# Altium PCB LED Board.PcbDoc
Units mil, origin at the board's own origin, x right, y up, seen from the top; angles counter-clockwise.
Board outline 800 x 800 mil, 2 copper layers (Top Layer, Bottom Layer); 1 components, 3 nets, 7 pads, 33 vias.
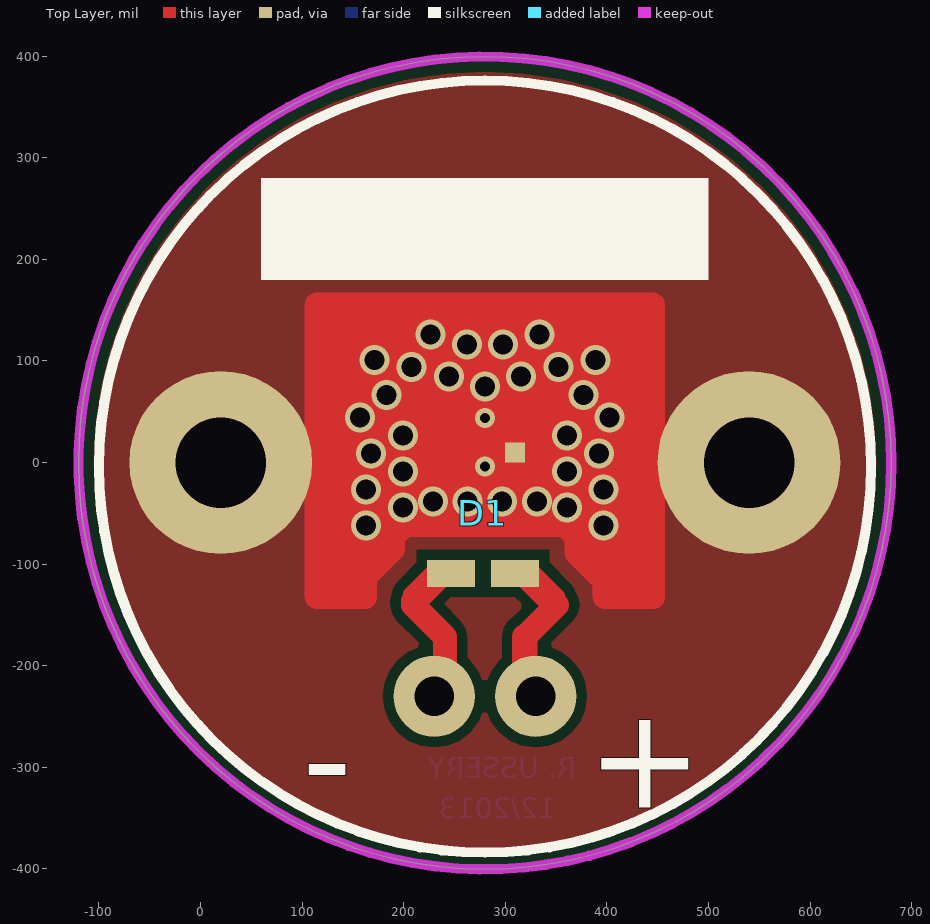
[diagram p0: Top Layer view]
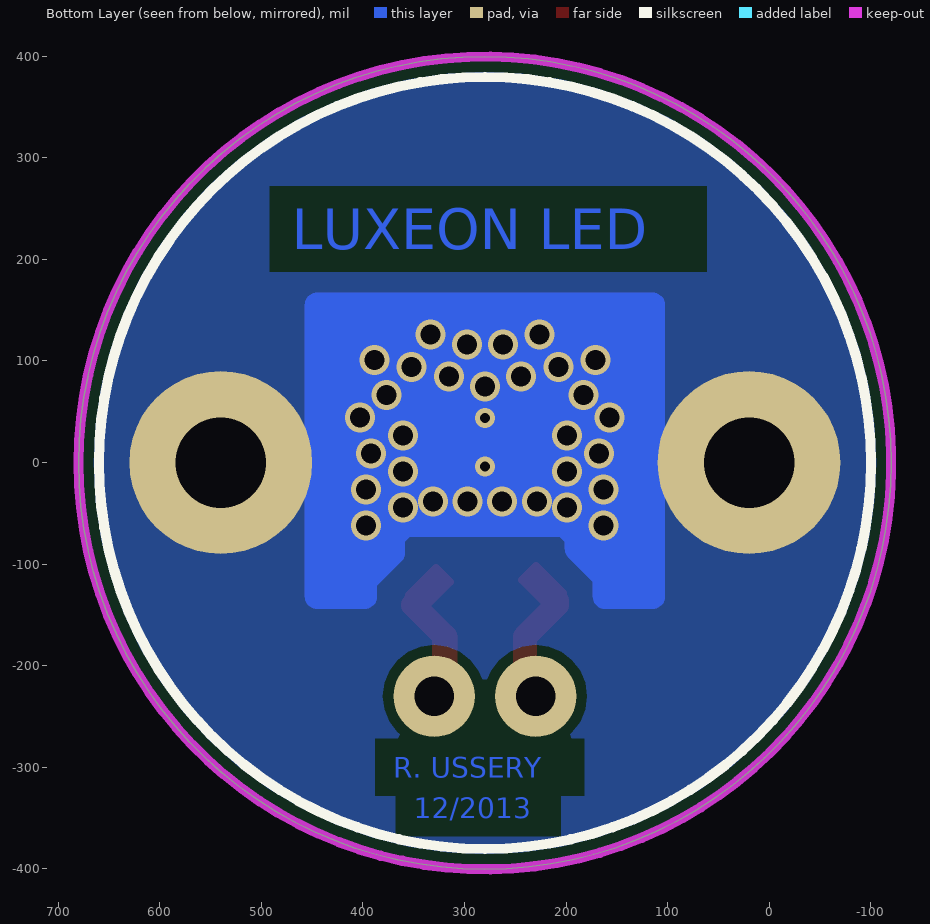
[diagram p1: Bottom Layer view, seen from below]

## Layer stack, top to bottom
Top Layer: signal copper 1.4
Dielectric: dielectric 12.6, FR-4, Dk 4.8
Bottom Layer: signal copper 1.4

## Board outline
-120,-0.35 ccw(c280,-0.35) 280,-400.35 ccw(c280,-0.35) 680,-0.35 ccw(c280,-0.35) 280,399.65 ccw(c280,-0.35)

## Design rules (kind name [scope] priority, off if disabled: settings)
Clearance [All] p1: gap=10
MinimumSolderMaskSliver [All] p1: minsoldermaskwidth=5
PolygonConnect [All] p1: connectstyle=Direct reliefconductorwidth=10 reliefentries=4 polygonreliefangle="90 Angle" airgapwidth=10
RoutingVias [All] p1: holewidth=28 width=50 viastyle="Through Hole" minholewidth=28 minwidth=50 maxholewidth=28 maxwidth=50
SolderMaskExpansion [All] p1: expansion=4
Width [All] p1: maxlimit=100 minlimit=6 preferedwidth=10
27 further rules are at their usual default settings.

## Components (designator, comment, footprint, x,y, rotation, side; value= is the part's Value field where it differs from the comment)
D1 "DIODE_WITH_HEATSINK" LUXEON_LED 280,0 r0 top

## Footprints (in the part's own frame and the unit in brackets; to place one, negate y for a bottom-side part, rotate by r counter-clockwise, add the part's x,y. Pads: shape width x height; smd on the part's side, far side on the other; paste and mask are expansions set on the pad)
LUXEON_LED [mm]
  rect 1.2x0.67 smd paste-0.1 mask+0: 1(-0.85,-2.775) 2(0.75,-2.775)
  rect 0.5x0.5 smd paste+0 mask+0: 3(0.75,0.25)
  Top Layer region: -1.275,-2.58 -1.95,-3.255 -1.6,-3.605 -0.925,-2.93
  Top Layer region: -4.2,-3.655 -4.315,-3.633 -4.412,-3.567 -4.478,-3.47 -4.5,-3.355 -4.5,-3.355 -4.5,3.945 -4.478,4.06 -4.412,4.157 -4.315,4.223 -4.2,4.245 -4.2,4.245 4.2,4.245 4.315,4.223 4.412,4.157 4.478,4.06 4.5,3.945 4.5,3.945 4.5,-3.355 4.478,-3.47 4.412,-3.567 4.315,-3.633 4.2,-3.655 4.2,-3.655 3,-3.655 2.885,-3.633 2.788,-3.567 2.722,-3.47 2.7,-3.355 2.7,-3.355 2.7,-3.079 2.088,-2.468 2.023,-2.37 2,-2.255 2,-2.255 2,-1.979 1.876,-1.855 -1.876,-1.855 -2,-1.979 -2,-2.155 -2.023,-2.27 -2.088,-2.368 -2.088,-2.368 -2.7,-2.979 -2.7,-3.355 -2.728,-3.481 -2.806,-3.584 -2.921,-3.645 -3.05,-3.651 -3.05,-3.651 -3.075,-3.654 -3.1,-3.655 -3.1,-3.655
  Top Layer region: 0.925,-2.98 1.562,-3.618 1.912,-3.268 1.575,-2.93 1.275,-2.63
  Top Layer lines w0.2: -1.275,-2.58 -1.95,-3.255 -1.6,-3.605 -0.925,-2.93 -1.275,-2.58 ; -1.275,-2.58 -1.275,-2.58 ; 0.875,-2.98 1.225,-2.63 1.9,-3.305 1.55,-3.655 0.875,-2.98 ; 0.875,-2.98 0.875,-2.98
  Top Layer lines w0.6: -3.1,-3.355 -4.2,-3.355 -4.2,3.945 4.2,3.945 4.2,-3.355 3,-3.355 3,-2.955 2.3,-2.255 2.3,-1.855 2,-1.555 -2,-1.555 -2.3,-1.855 -2.3,-2.155 -3,-2.855 -3,-3.055 -3,-3.355 ; -1.7,-3.355 -1.8,-3.455 -1.8,-3.555 -1,-4.355 ; 1,-4.355 1.8,-3.555 ; 1.6,-3.355 1.8,-3.555 ; 1.8,-3.555 1.8,-3.555
  Bottom Layer region: -4.2,-3.655 -4.315,-3.633 -4.412,-3.567 -4.478,-3.47 -4.5,-3.355 -4.5,-3.355 -4.5,3.945 -4.478,4.06 -4.412,4.157 -4.315,4.223 -4.2,4.245 -4.2,4.245 4.2,4.245 4.315,4.223 4.412,4.157 4.478,4.06 4.5,3.945 4.5,3.945 4.5,-3.355 4.478,-3.47 4.412,-3.567 4.315,-3.633 4.2,-3.655 4.2,-3.655 3,-3.655 2.885,-3.633 2.788,-3.567 2.722,-3.47 2.7,-3.355 2.7,-3.355 2.7,-3.079 2.088,-2.468 2.023,-2.37 2,-2.255 2,-2.255 2,-1.979 1.876,-1.855 -1.876,-1.855 -2,-1.979 -2,-2.155 -2.023,-2.27 -2.088,-2.368 -2.088,-2.368 -2.7,-2.979 -2.7,-3.355 -2.728,-3.481 -2.806,-3.584 -2.921,-3.645 -3.05,-3.651 -3.05,-3.651 -3.075,-3.654 -3.1,-3.655 -3.1,-3.655
  body extent -1.57,-3.2 1.47,1.29, height 1.98

## Free pads (board coordinates)
  round 180 hole 89: 0(20,0) 1(540,0)
  round 80 hole 39: GND(230,-230) VCC(330,-230)

## Via types
v1: diameter 29.53, hole 19.68, Top Layer to Bottom Layer, tented both sides, 31 vias
v2: diameter 19.68, hole 9.84, Top Layer to Bottom Layer, tented both sides, 2 vias

## Nets (pads, with @x,y where several pads share a name; then routed paths per layer and width w, separated by ;. In a path a pad name is that pad's centre, name@x,y a point inside that pad or via, vN(x,y) a via of type N, cw(c..) or ccw(c..) an arc to the next point about the centre after c; other vN are vias at no path point)
GND: D1.1 pad.GND | length 62.9
  Top Layer w23.62: pad.GND 240.63,-219.37 240.63,-171.46
HEATSINK: D1.3 pad.0 pad.1
  other v1: 163.07,-61.81 396.93,-61.81 199.29,-44.09 360.71,-44.09 228.82,-38.19 263.07,-38.19 296.93,-38.19 331.18,-38.19 163.07,-26.38 396.93,-26.38 199.29,-8.66 360.71,-8.66 167.8,9.06 392.2,9.06 199.29,26.77 360.71,26.77 157.17,44.49 402.83,44.49 183.15,66.54 376.85,66.54 280,74.8 244.57,84.65 315.43,84.65 207.56,94.09 352.44,94.09 171.34,101.18 388.66,101.18 262.28,116.14 297.72,116.14 226.46,125.98 333.54,125.98
  other v2: 280,-3.94 280,44.09
VCC: D1.2 pad.VCC | length 62.9
  Top Layer w25: 319.37,-171.46 319.37,-219.37 pad.VCC

## Polygon pours and split planes (outlines as drawn)
HEATSINK on Bottom Layer "GND" (solid, pour order 3): -120,-0.35 ccw(c280,-0.35) 280,-400.35 ccw(c280,-0.35) 680,-0.35 ccw(c280,-0.35) 280,399.65 ccw(c280,-0.35)
no net on Top Overlay "Notes" (solid): 60,180 60,280 500,280 500,180
HEATSINK on Top Layer "GND" (solid, pour order 4): -120,-0.35 ccw(c280,-0.35) 280,-400.35 ccw(c280,-0.35) 680,-0.35 ccw(c280,-0.35) 280,399.65 ccw(c280,-0.35)

## Keep-outs
Keep-Out Layer:
  circle w10: c280,-0.35 r400

## Other copper
Bottom Layer:
  text "LUXEON LED" at 470,210 h40
  text "R. USSERY" at 370,-310 h20
  text "12/2013" at 350,-350 h20

## Silkscreen, mask and mechanical layers (free items; w line width, h text height)
Top Overlay:
  circle w10: c280,-3.94 r380
  text "-" at 100,-340 h100
  text "+" at 380,-340 h100
Bottom Overlay:
  circle w10: c280,-0.35 r380
Bottom Solder:
  region: 105,-303.46 cw(c280,-0.35) 455,-303.46 455,-185 330,-60 230,-60 105,-185
  lines w10: 105,-303.46 cw(c280,-0.35) 455,-303.46 455,-185 330,-60 230,-60 105,-185 105,-303.46